# EAGLE board CT_schematic (EAGLE 7.6.0)

Size 100 x 80 mm. Coordinates in mm from the lower left corner, seen from the top.
Outline: 0,0 100,0 100,80 0,80 0,0
Copper layers (1*16): Top 0.035mm / dielectric 1.5mm / Bottom 0.035mm
Design rules "default": minimum track width 10mil, minimum drill 24mil, track to track 8mil, track to pad 8mil, pad to pad 8mil, via to via 8mil, smd to smd 8mil, copper to edge 40mil, drill to drill 8mil, minimum pad ring 10mil, minimum via ring 8mil, stop-mask expansion 4mil, vias tented up to drill 0mil, thermal gap 10mil

## Footprints (pad centres in the part's own frame; a part is rotated, then mirrored left to right if it is on the bottom)
C0603 = smd 0.8 x 0.8: 1 -0.762,0; 2 0.762,0
C0402 = smd 0.5 x 0.5: 1 -0.508,0; 2 0.508,0
C1206 = smd 1.3 x 1.6: 1 -1.524,0; 2 1.524,0
C1210 = smd 1.2 x 2.5: 1 -1.524,0; 2 1.524,0
EXV-9H = smd 3.505 x 1.676: 1 -2.857,0; 2 2.857,0
L0603 = smd 0.8 x 0.8: 1 -0.762,0; 2 0.762,0
PJ-037B_PACKAGE = drill 3.7 square: 1 12,0 | drill 3.2 square: 2 6,0
R0603 = smd 0.8 x 0.8: 1 -0.762,0; 2 0.762,0
LQFP100 = smd 0.3 x 1.2: 1 -6,-7.75; 2 -5.5,-7.75; 3 -5,-7.75; 4 -4.5,-7.75; 5 -4,-7.75; 6 -3.5,-7.75; 7 -3,-7.75; 8 -2.5,-7.75; 9 -2,-7.75; 10 -1.5,-7.75; 11 -1,-7.75; 12 -0.5,-7.75; 13 0,-7.75; 14 0.5,-7.75; 15 1,-7.75; 16 1.5,-7.75; 17 2,-7.75; 18 2.5,-7.75; 19 3,-7.75; 20 3.5,-7.75; 21 4,-7.75; 22 4.5,-7.75; 23 5,-7.75; 24 5.5,-7.75; 25 6,-7.75; 51 6,7.75; 52 5.5,7.75; 53 5,7.75; 54 4.5,7.75; 55 4,7.75; 56 3.5,7.75; 57 3,7.75; 58 2.5,7.75; 59 2,7.75; 60 1.5,7.75; 61 1,7.75; 62 0.5,7.75; 63 0,7.75; 64 -0.5,7.75; 65 -1,7.75; 66 -1.5,7.75; 67 -2,7.75; 68 -2.5,7.75; 69 -3,7.75; 70 -3.5,7.75; 71 -4,7.75; 72 -4.5,7.75; 73 -5,7.75; 74 -5.5,7.75; 75 -6,7.75 | smd 1.2 x 0.3: 26 7.75,-6; 27 7.75,-5.5; 28 7.75,-5; 29 7.75,-4.5; 30 7.75,-4; 31 7.75,-3.5; 32 7.75,-3; 33 7.75,-2.5; 34 7.75,-2; 35 7.75,-1.5; 36 7.75,-1; 37 7.75,-0.5; 38 7.75,0; 39 7.75,0.5; 40 7.75,1; 41 7.75,1.5; 42 7.75,2; 43 7.75,2.5; 44 7.75,3; 45 7.75,3.5; 46 7.75,4; 47 7.75,4.5; 48 7.75,5; 49 7.75,5.5; 50 7.75,6; 76 -7.75,6; 77 -7.75,5.5; 78 -7.75,5; 79 -7.75,4.5; 80 -7.75,4; 81 -7.75,3.5; 82 -7.75,3; 83 -7.75,2.5; 84 -7.75,2; 85 -7.75,1.5; 86 -7.75,1; 87 -7.75,0.5; 88 -7.75,0; 89 -7.75,-0.5; 90 -7.75,-1; 91 -7.75,-1.5; 92 -7.75,-2; 93 -7.75,-2.5; 94 -7.75,-3; 95 -7.75,-3.5; 96 -7.75,-4; 97 -7.75,-4.5; 98 -7.75,-5; 99 -7.75,-5.5; 100 -7.75,-6
QFN24_2 = smd 0.6 x 0.2: 1 -1.6,1; 2 -1.6,0.6; 3 -1.6,0.2; 4 -1.6,-0.2; 5 -1.6,-0.6; 6 -1.6,-1; 13 1.6,-1; 14 1.6,-0.6; 15 1.6,-0.2; 16 1.6,0.2; 17 1.6,0.6; 18 1.6,1 | smd 0.2 x 0.6: 7 -1,-1.6; 8 -0.6,-1.6; 9 -0.2,-1.6; 10 0.2,-1.6; 11 0.6,-1.6; 12 1,-1.6; 19 1,1.6; 20 0.6,1.6; 21 0.2,1.6; 22 -0.2,1.6; 23 -0.6,1.6; 24 -1,1.6 | smd 1.75 x 1.59: 25 0,0
ASEK = smd 1.4 x 1: 1 -1.1,-0.8; 2 1.1,-0.8; 3 1.1,0.8; 4 -1.1,0.8
ASFL1 = smd 1.7 x 1.5: 1 -1.27,-1.1; 2 1.27,-1.1; 3 1.27,1.1; 4 -1.27,1.1
WSON-8 = smd 0.3 x 0.6: 1 -0.75,0; 2 0.05,0; 3 0.85,0; 4 1.65,0; 5 1.65,3.8; 6 0.85,3.8; 7 0.05,3.8; 8 -0.75,3.8 | smd 3 x 2.6: PAD 0.45,1.9
SON-6 = smd 0.55 x 0.3: 1 -0.355,0.5 | smd 0.52 x 0.3: 2 -0.37,0; 3 -0.37,-0.5; 4 0.37,-0.5; 5 0.37,0; 6 0.37,0.5
SW_4-1437565-2 = smd 1.4 x 2.1: 1 -2.23,4.55; 2 -2.23,-4.55; 3 2.23,4.55; 4 2.23,-4.55
LGM67K-G1J2-24-Z = smd 0.8 x 1.4: A -2,0; C 0,0
NC7SZ125M5X = smd 1.3 x 0.7: 1 -1.3,0.95; 2 -1.3,0; 3 -1.3,-0.95; 4 1.3,-0.95; 5 1.3,0.95
DUMMY_PACKAGE_106 = drill 0.3: 1 0,-1; 2 1.5,-1; 3 3,-1

## Placement (x,y rotation side)
C1  1e-07  [C0603]  -58.42,49.53 0 top  (outside the outline)
C2  1e-07  [C0603]  -15.24,54.61 0 top  (outside the outline)
C3  1e-07  [C0603]  -19.05,54.61 0 top  (outside the outline)
C4  1e-07  [C0603]  -22.86,54.61 0 top  (outside the outline)
C5  1e-07  [C0603]  -26.67,54.61 0 top  (outside the outline)
C6  4.7e-06  [C0603]  -54.61,49.53 0 top  (outside the outline)
C7  1e-07  [C0603]  -30.48,54.61 0 top  (outside the outline)
C8  1e-08  [C0603]  -34.29,54.61 0 top  (outside the outline)
C9  1e-06  [C0603]  -38.1,54.61 0 top  (outside the outline)
C10  1e-07  [C0402]  -26.67,59.69 0 top  (outside the outline)
C11  1e-07  [C0402]  -30.48,59.69 0 top  (outside the outline)
C12  1e-08  [C0402]  -34.29,59.69 0 top  (outside the outline)
C13  1e-08  [C0402]  -38.1,59.69 0 top  (outside the outline)
C14  1e-08  [C0402]  -41.91,59.69 0 top  (outside the outline)
C15  1e-08  [C0402]  -45.72,59.69 0 top  (outside the outline)
C16  1e-05  [C1206]  -45.72,41.91 0 top  (outside the outline)
C17  1e-05  [C1210]  -39.37,41.91 0 top  (outside the outline)
C18  1e-07  [C0402]  -49.53,59.69 0 top  (outside the outline)
C19  0.0001  [EXV-9H]  -55.88,34.29 0 top  (outside the outline)
C20  0.0001  [EXV-9H]  -17.78,43.18 0 top  (outside the outline)
C21  1e-08  [C0402]  -53.34,59.69 0 top  (outside the outline)
F1  240.0  [L0603]  -41.91,54.61 0 top  (outside the outline)
J1  PJ-037B  [PJ-037B_PACKAGE]  -49.53,7.62 0 top  (outside the outline)
R2  1000.0  [R0603]  -45.72,54.61 0 top  (outside the outline)
R4  4700.0  [R0603]  -49.53,54.61 0 top  (outside the outline)
R5  2200.0  [R0603]  -53.34,54.61 0 top  (outside the outline)
R6  2200.0  [R0603]  -57.15,54.61 0 top  (outside the outline)
R7  10000.0  [R0603]  -30.48,49.53 0 top  (outside the outline)
R8  10000.0  [R0603]  -35.56,49.53 0 top  (outside the outline)
R9  10000.0  [R0603]  -40.64,49.53 0 top  (outside the outline)
R10  100000.0  [R0603]  -15.24,49.53 0 top  (outside the outline)
R11  2231.0  [R0603]  -15.24,59.69 0 top  (outside the outline)
R12  1000.0  [R0603]  -19.05,59.69 0 top  (outside the outline)
R13  10000.0  [R0603]  -45.72,49.53 0 top  (outside the outline)
R14  10000.0  [R0603]  -50.8,49.53 0 top  (outside the outline)
R15  9100.0  [R0603]  -22.86,59.69 0 top  (outside the outline)
R16  680000.0  [R0603]  -20.32,49.53 0 top  (outside the outline)
R17  120000.0  [R0603]  -25.4,49.53 0 top  (outside the outline)
U1  STM32L151VBT6A  [LQFP100]  -25.4,8.89 0 top  (outside the outline)
U2  MPU-9250  [QFN24_2]  -57.15,41.91 0 top  (outside the outline)
U3  ASEK-32.768KHz-ECST  [ASEK]  -46.99,34.29 0 top  (outside the outline)
U4  ASFL1-25MHZ-NCS  [ASFL1]  -26.67,34.29 0 top  (outside the outline)
U5  LP3878SDX-ADJ/NOPB  [WSON-8]  -49.53,20.32 0 top  (outside the outline)
U6  TPS3895ADRYR  [SON-6]  -13.97,63.5 0 top  (outside the outline)
U7  4-1437565-2  [SW_4-1437565-2]  -27.94,24.13 0 top  (outside the outline)
U8  Q65110A2395  [LGM67K-G1J2-24-Z]  -27.94,41.91 0 top  (outside the outline)
U9  nc7sz125m5x  [NC7SZ125M5X]  -50.8,40.64 0 top  (outside the outline)
U10  Dummy  [DUMMY_PACKAGE_106]  -59.69,59.69 0 top  (outside the outline)

## Library data of the parts
C1-C21 F1 J1 R2 R4-R17 U1-U10 = circuit_tree

## Nets
CLK_U1_8: U1.8 U3.3
CLK_U1_12: U1.12 U4.3
GND: C1.2 C2.2 C3.2 C4.2 C5.2 C6.2 C7.2 C8.2 C9.2 C10.2 C11.2 C12.2 C13.2 C14.2 C15.2 C16.2 C17.2 C18.2 C19.2 C20.2 C21.2 J1.2 R2.2 R7.2 R9.2 R12.2 R15.2 R17.2 U1.10 U1.19 U1.20 U1.27 U1.49 U1.74 U1.99 U2.18 U2.20 U2.25 U3.2 U4.2 U5.3 U5.PAD U6.2 U8.C U9.1 U9.3 U10.1
NET_U1_6: C7.1 U1.6
NET_U1_14: R4.1 U1.14 U9.4
NET_U1_22: C8.1 C9.1 F1.1 U1.21 U1.22
NET_U1_92: R5.1 U1.92 U2.23
NET_U1_93: R6.1 U1.93 U2.24
NET_U1_94: R7.1 U1.94
NET_U1_97: U8.A
NET_U1_98: U7.3 U7.4
NET_U2_9: R9.1 U2.9
NET_U2_10: C10.1 U2.10
NET_U2_22: R8.1 U2.22
NET_U5_1: C15.1 U5.1
NET_U5_6: R11.2 R12.1 U5.6
NET_U5_8: R10.1 U5.8
NET_U6_1: R14.1 R15.1 U6.1
NET_U6_3: R16.2 R17.1 U6.3
NET_U6_4: R13.1 U6.4 U9.2
NET_U7_1: R2.1 U7.1 U7.2
PROC_ADC_IN20: U1.53 U10.2
PROC_ADC_IN22: U1.38 U10.3
PROC_GPIO_TO_U2_FSYNC: U1.2 U2.11
PROC_GPIO_TO_U2_INT_B: U1.1 U2.12
VCC_S1_5V9: C16.1 C19.1 C20.1 J1.1 R10.2 U5.4
VCC_TIER1_3V3: C1.1 C2.1 C3.1 C4.1 C5.1 C6.1 C11.1 C12.1 C13.1 C14.1 C17.1 C18.1 C21.1 F1.2 R4.2 R5.2 R6.2 R8.2 R11.1 R13.2 R14.2 R16.1 U1.11 U1.28 U1.50 U1.75 U1.100 U2.1 U2.8 U2.13 U3.4 U4.4 U5.5 U6.6 U9.5

## Tracks (layer width: path | path; a pad name or v marks a point on that pad's centre or on a via)
CLK_U1_8  (1 unrouted)
CLK_U1_12  (1 unrouted)
GND  (46 unrouted)
NET_U1_6  (1 unrouted)
NET_U1_14  (2 unrouted)
NET_U1_22  (4 unrouted)
NET_U1_92  (2 unrouted)
NET_U1_93  (2 unrouted)
NET_U1_94  (1 unrouted)
NET_U1_98  (1 unrouted)
NET_U2_9  (1 unrouted)
NET_U2_10  (1 unrouted)
NET_U2_22  (1 unrouted)
NET_U5_1  (1 unrouted)
NET_U5_6  (2 unrouted)
NET_U5_8  (1 unrouted)
NET_U6_1  (2 unrouted)
NET_U6_3  (2 unrouted)
NET_U6_4  (2 unrouted)
NET_U7_1  (2 unrouted)
PROC_ADC_IN20  (1 unrouted)
PROC_ADC_IN22  (1 unrouted)
PROC_GPIO_TO_U2_FSYNC  (1 unrouted)
PROC_GPIO_TO_U2_INT_B  (1 unrouted)
VCC_S1_5V9  (5 unrouted)
VCC_TIER1_3V3  (34 unrouted)